# Altium PCB Right_Ref_Sensor_PcbDoc.PcbDoc
Units mil, origin at the board's own origin, x right, y up, seen from the top; angles counter-clockwise.
Board outline 1190 x 1190 mil, 2 copper layers (Top Layer, Bottom Layer); 4 components, 6 nets, 27 pads, 5 vias.
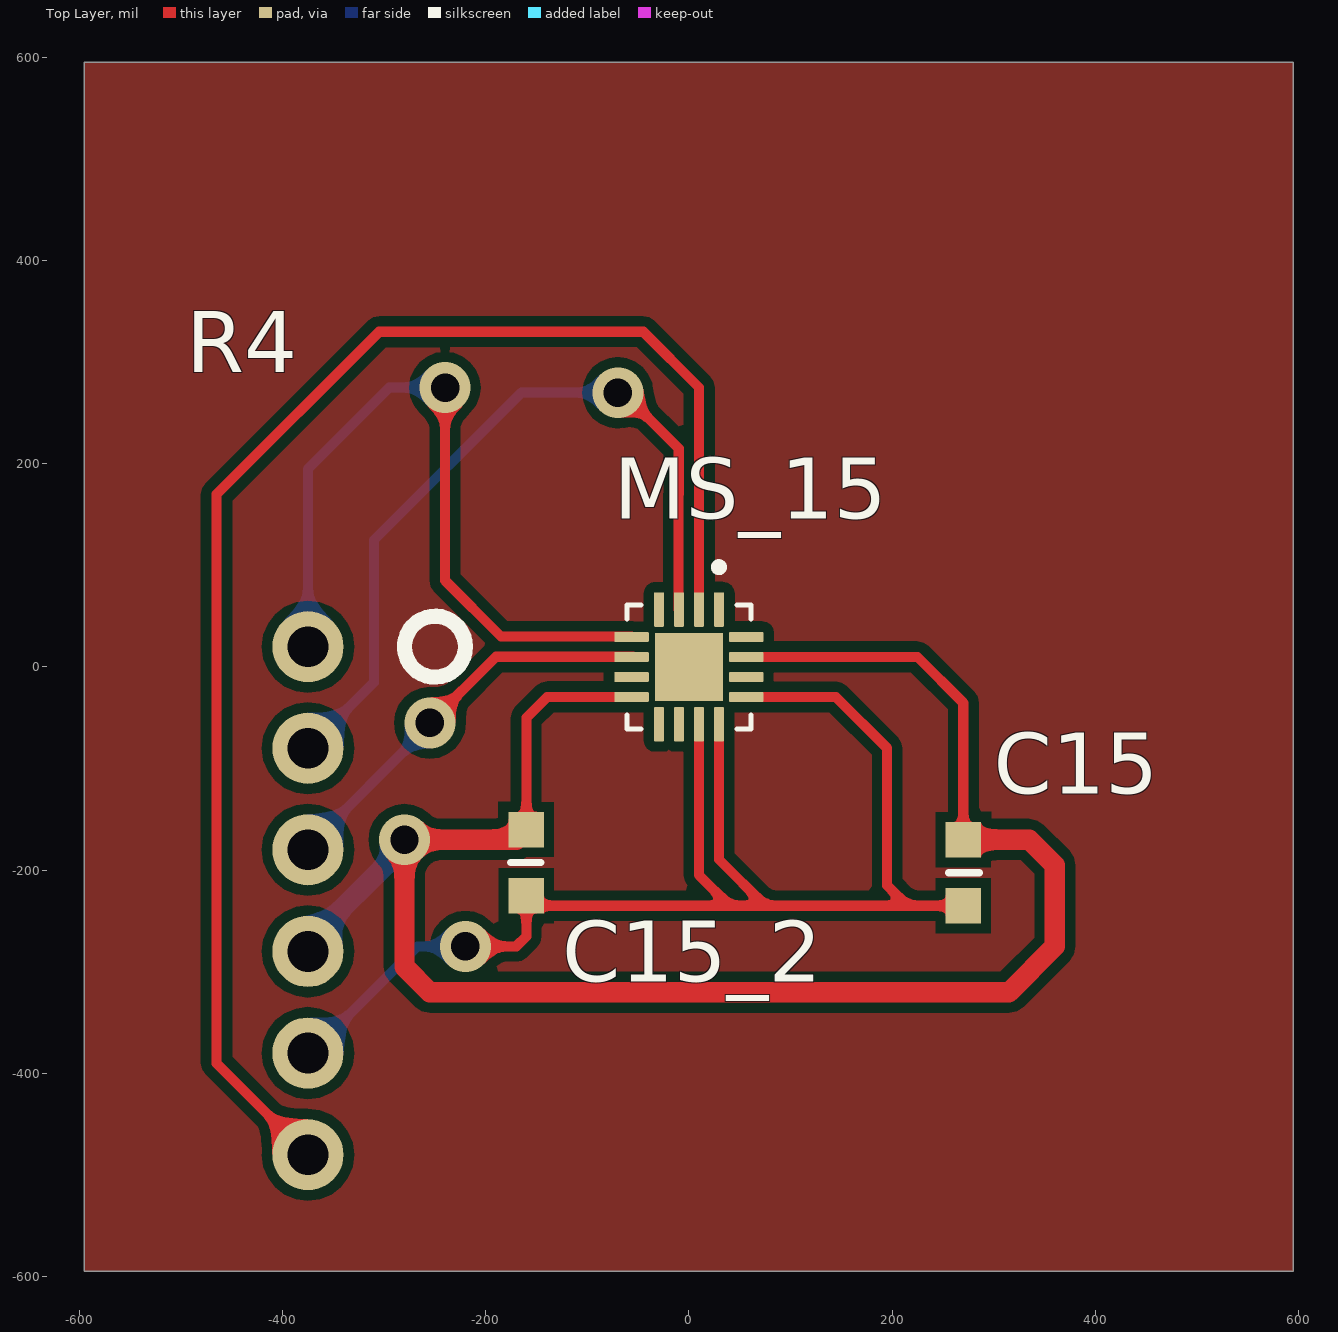
[diagram p0: Top Layer view]
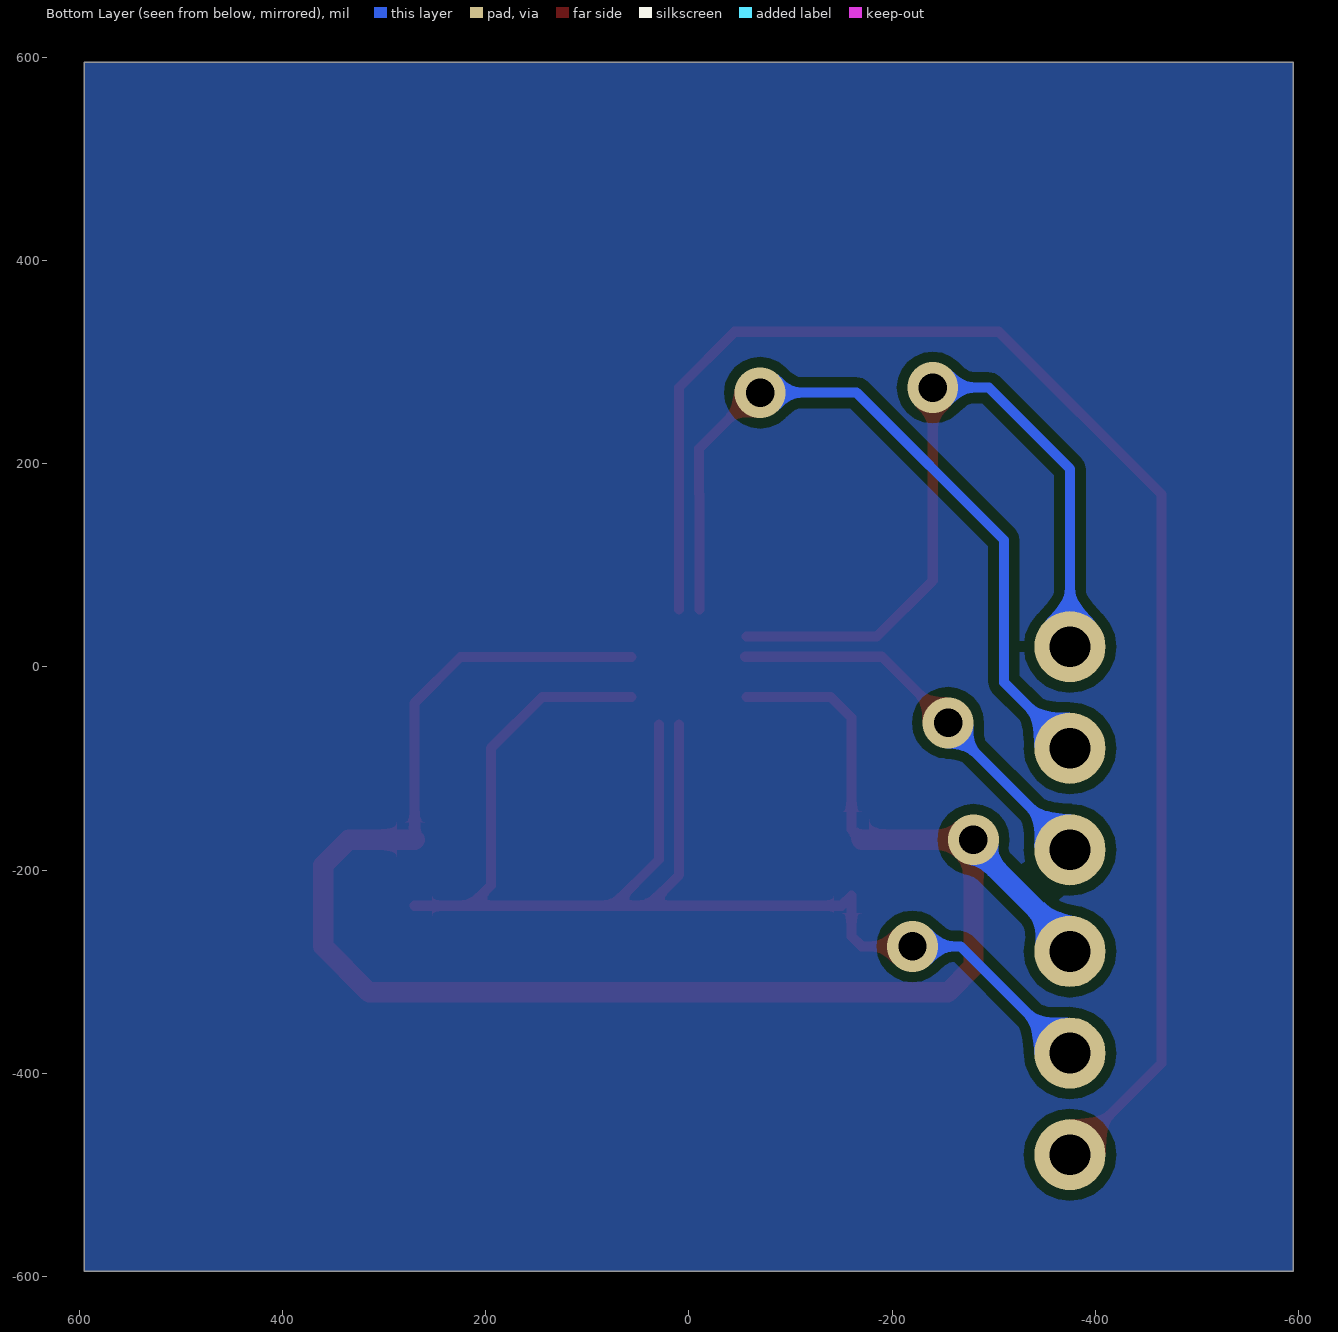
[diagram p1: Bottom Layer view, seen from below]

## Layer stack, top to bottom
Top Solder: solder mask 0.4, Solder Resist, Dk 3.5
Top Layer: signal copper 1.4
Dielectric 1: dielectric 12.6, FR-4, Dk 4.8
Bottom Layer: signal copper 1.4
Bottom Solder: solder mask 0.4, Solder Resist, Dk 3.5

## Board outline
-595,-595 595,-595 595,595 -595,595

## Design rules (kind name [scope] priority, off if disabled: settings)
Clearance [All] p1: gap=10 ignorepadtopadclearanceinfootprint=FALSE except(0: Arc-Hole Track-Hole SMDPad-Hole THPad-Hole Via-Hole Fill-Hole Poly-Hole Region-Hole Text-Hole)
PolygonConnect [All] p1: connectstyle=Relief reliefconductorwidth=10 reliefentries=4 polygonreliefangle="90 Angle" airgapwidth=10
RoutingVias [All] p1: holewidth=28 width=50 viastyle="Through Hole" minholewidth=28 minwidth=50 maxholewidth=28 maxwidth=50
SolderMaskExpansion [All] p1: expansion=4 istentingtop=FALSE
Width [All] p1: maxlimit=10 minlimit=10 preferedwidth=10
30 further rules are at their usual default settings.

## Components (designator, comment, footprint, x,y, rotation, side; value= is the part's Value field where it differs from the comment)
C15 "0.1uF" CAP_0603 270,-202.5 r90 top
C15_2 "0.1uF" CAP_0603 -160,-192.5 r270 top
MS_15 "MLX90393SLW ABA 011 RE" MLX90393 0,0 r270 top
R4 "PIN_right" PIN_RIGHT_4 -375,-480 r0 top (schematic designator CON_R_4)

## Footprints (in the part's own frame and the unit in brackets; to place one, negate y for a bottom-side part, rotate by r counter-clockwise, add the part's x,y. Pads: shape width x height; smd on the part's side, far side on the other; paste and mask are expansions set on the pad)
CAP_0603 [mil]
  rect 35x35 smd: 1(-32.5,0) 2(32.5,0)
  silkscreen extent 0,-16 0,14, body extent -53,-18 49,21, height 35
MLX90393 [mm]
  rrect25% 0.86x0.26 smd: 1(-1.435,0.75) 2(-1.435,0.25) 3(-1.435,-0.25) 4(-1.435,-0.75) 9(1.435,-0.75) 10(1.435,-0.25) 11(1.435,0.25) 12(1.435,0.75)
  rrect25% 0.26x0.86 smd: 5(-0.75,-1.435) 6(-0.25,-1.435) 7(0.25,-1.435) 8(0.75,-1.435) 13(0.75,1.435) 14(0.25,1.435) 15(-0.25,1.435) 16(-0.75,1.435)
  rect 1.71x1.71 smd paste-2: 17(0,0)
  silkscreen extent -2.59,-1.55 1.55,1.55
PIN_RIGHT_4 [mil]
  round 70 hole 40: 1(0,500) 2(0,400) 3(0,300) 4(0,200) 5(0,100) 6(0,0)
  silkscreen extent 95,470 155,530

## Part data
C15 C15_2: library part CAP, "Capacitance"
MS_15: "MLX90393 Sensor"
R4: library part PIN_right_4

## Via types
v1: diameter 50, hole 28, Top Layer to Bottom Layer, 5 vias

## Nets (pads, with @x,y where several pads share a name; then routed paths per layer and width w, separated by ;. In a path a pad name is that pad's centre, name@x,y a point inside that pad or via, vN(x,y) a via of type N, cw(c..) or ccw(c..) an arc to the next point about the centre after c; other vN are vias at no path point)
15: MS_15.2 R4.6 | length 1469.8
  Top Layer w10: R4.6 -465,-390 -465,170 -305,330 -45,330 9.84,275.16 MS_15.2
GND: C15.1 C15_2.2 MS_15.11 MS_15.12 MS_15.13 R4.5 | length 1447.8
  Top Layer w10: v1(-220,-275) -170,-275 -160,-265 C15_2.2 -150,-235 40,-235 ; MS_15.11 9.84,-204.84 40,-235 ; MS_15.12 29.53,-189.53 75,-235 ; MS_15.13 144.53,-29.53 195,-80 195,-215 215,-235 ; C15.1 215,-235 ; 40,-235 75,-235 ; 75,-235 215,-235
  Bottom Layer w10: R4.5 -372.27,-380 -267.27,-275 v1(-220,-275)
MISO: MS_15.6 R4.3 | length 421.3
  Top Layer w10: v1@-255,-35.32 v1(-255,-55) -190,10 MS_15.6@-55,10
  Bottom Layer w10: R4.3 -375,-177.5 -255,-57.5 v1(-255,-55)
MOSI: MS_15.5 R4.1 | length 739.4
  Top Layer w10: v1(-240,275) -240,85 -184.96,29.96 MS_15.5@-56.5,29.96
  Bottom Layer w10: R4.1 -375,195 -295,275 v1(-240,275)
SCL: MS_15.3 R4.2 | length 773.4
  Top Layer w10: v1(-70,270) -65,270 -10,215 -10,170.55 -10.28,170.28 MS_15.3@-10.28,56.5
  Bottom Layer w10: R4.2 -310,-15 -310,125 -165,270 v1(-70,270)
VCC: C15.2 C15_2.1 MS_15.8 MS_15.15 R4.4 | length 1836.7
  Top Layer w10: C15_2.1@-170,-170 C15_2.1 -160,-50 -139.53,-29.53 MS_15.8 ; MS_15.15 224.84,9.84 270,-35.32 C15.2
  Top Layer w20: C15_2.1@-170,-170 v1(-280,-170) -280,-295 -255,-320 315,-320 360,-275 360,-195 335,-170 C15.2
  Bottom Layer w20: R4.4 -375,-271.35 -280,-176.35 v1(-280,-170)
pads on no net: MS_15.1 MS_15.4 MS_15.7 MS_15.9 MS_15.10 MS_15.14 MS_15.16 MS_15.17

## Polygon pours and split planes (outlines as drawn)
no net on Bottom Layer "NONET_L02_P000" (solid, pour order 0): -595,595 -595,-595 595,-595 595,595
no net on Top Layer "NONET_L01_P001" (solid, pour order 1): -595,595 -595,-595 595,-595 595,595

## Silkscreen, mask and mechanical layers (free items; w line width, h text height)
Mechanical 1:
  the board outline again, w10